# EAGLE board TSB rev2 TSAL rev5 (EAGLE 9.6.2), part 1 of 2
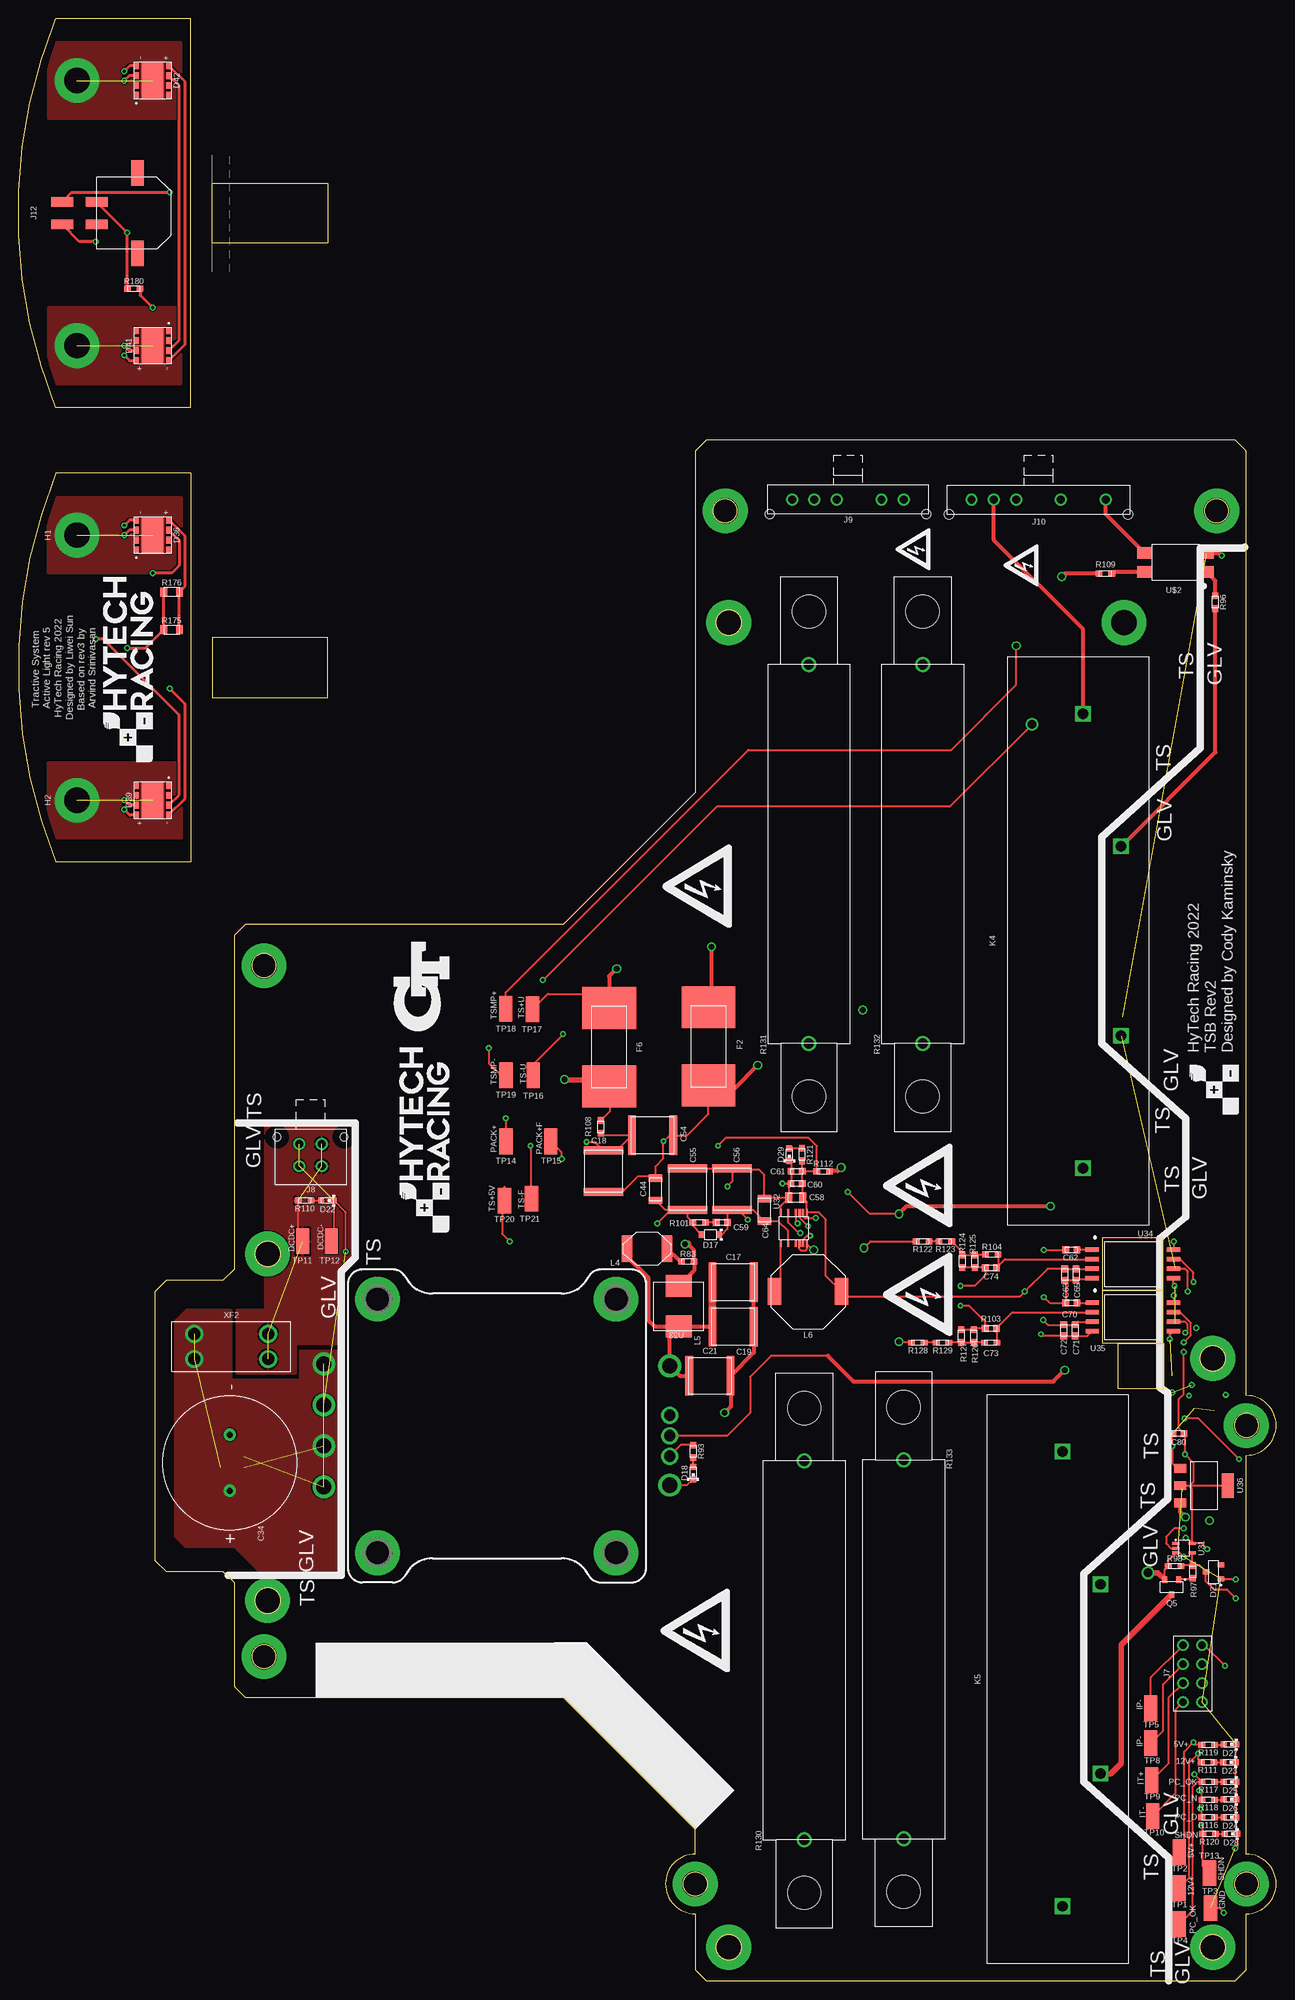
[diagram p0: board, top side]
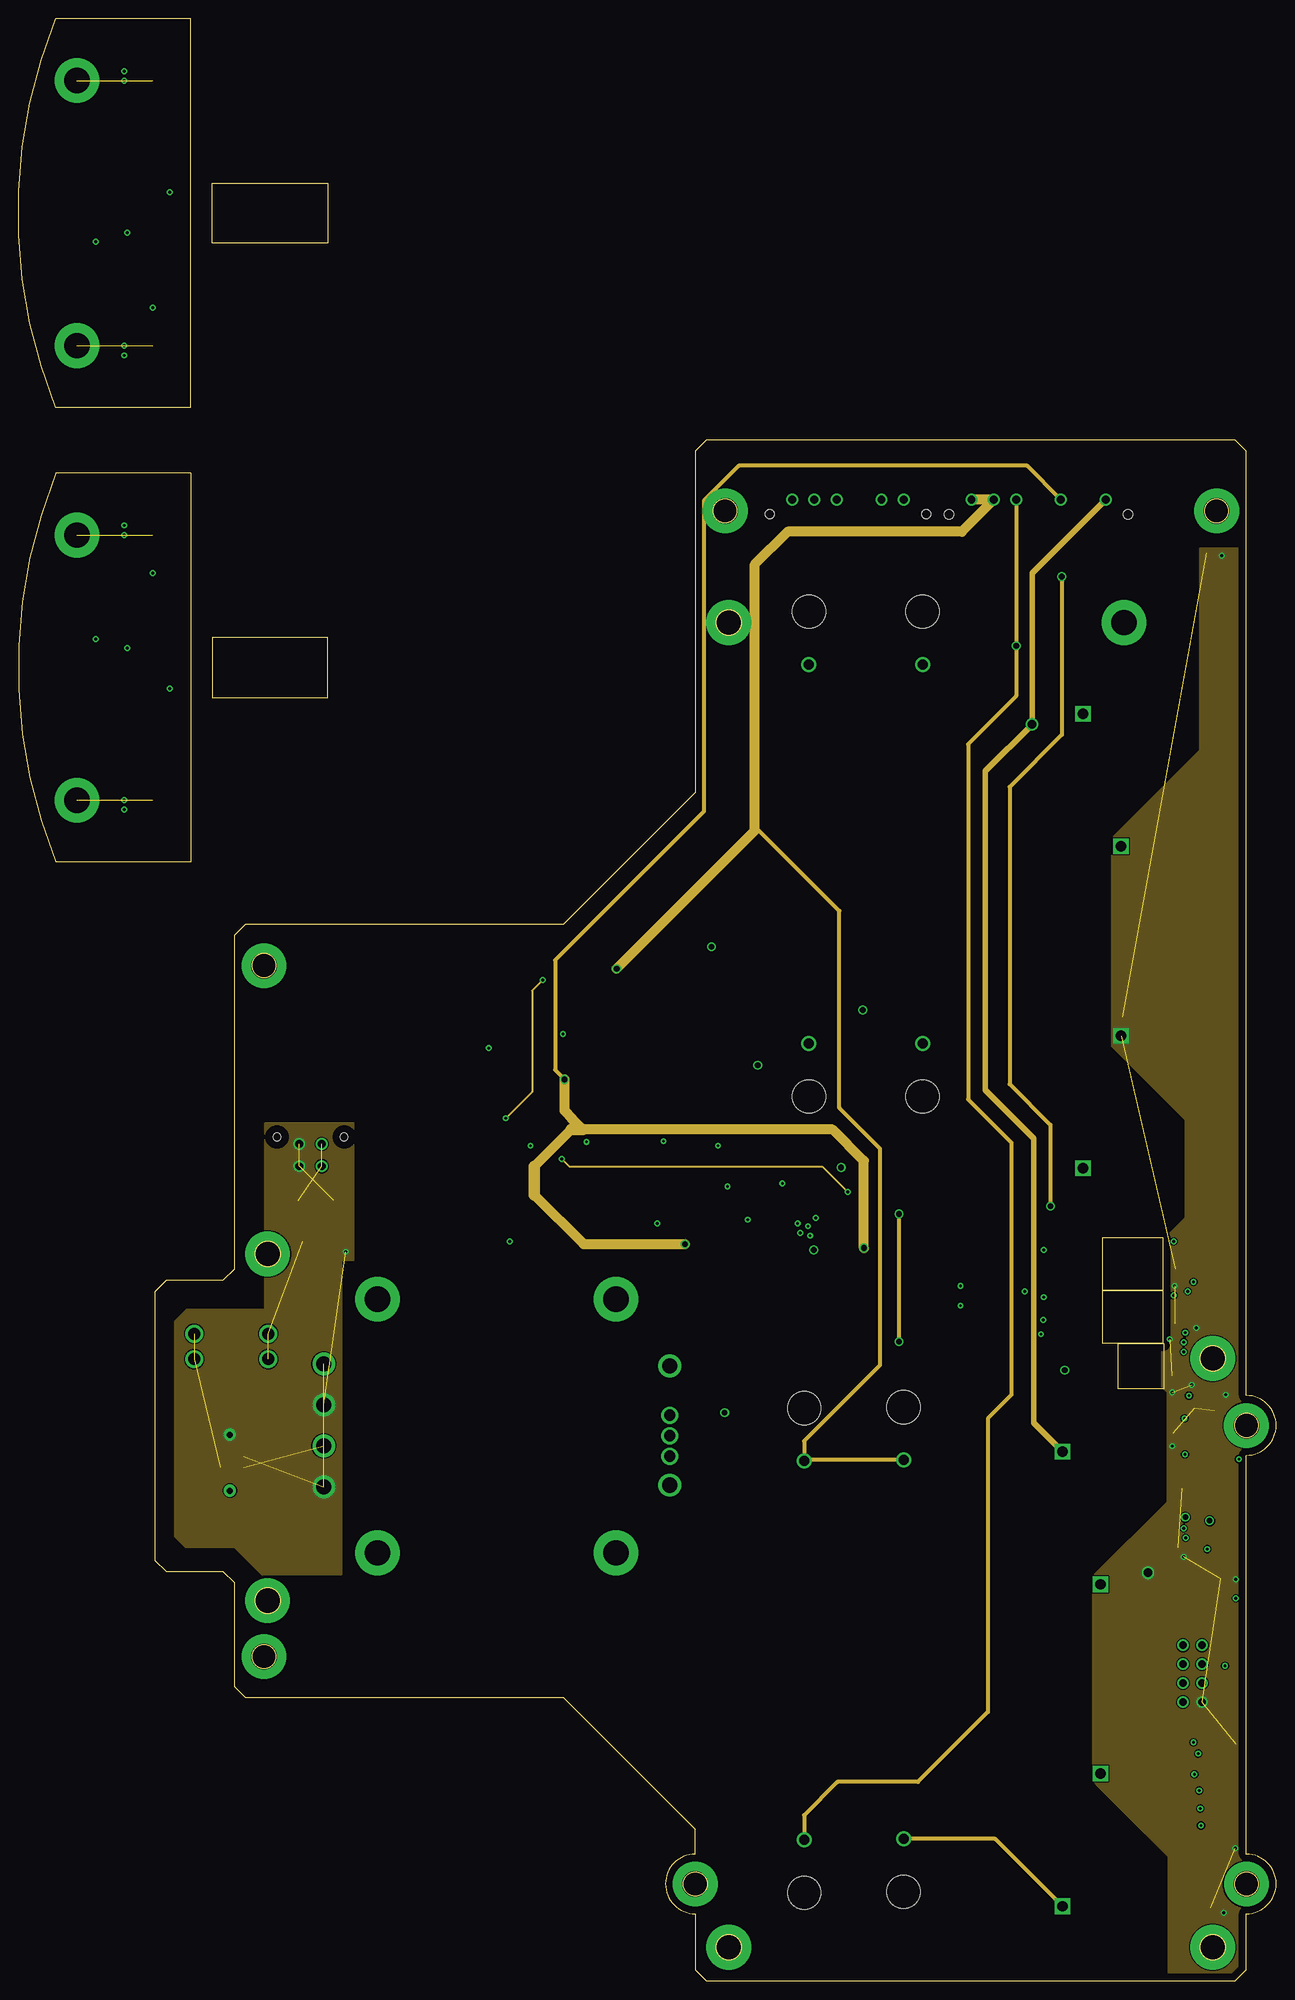
[diagram p1: board, inner layer Route2]
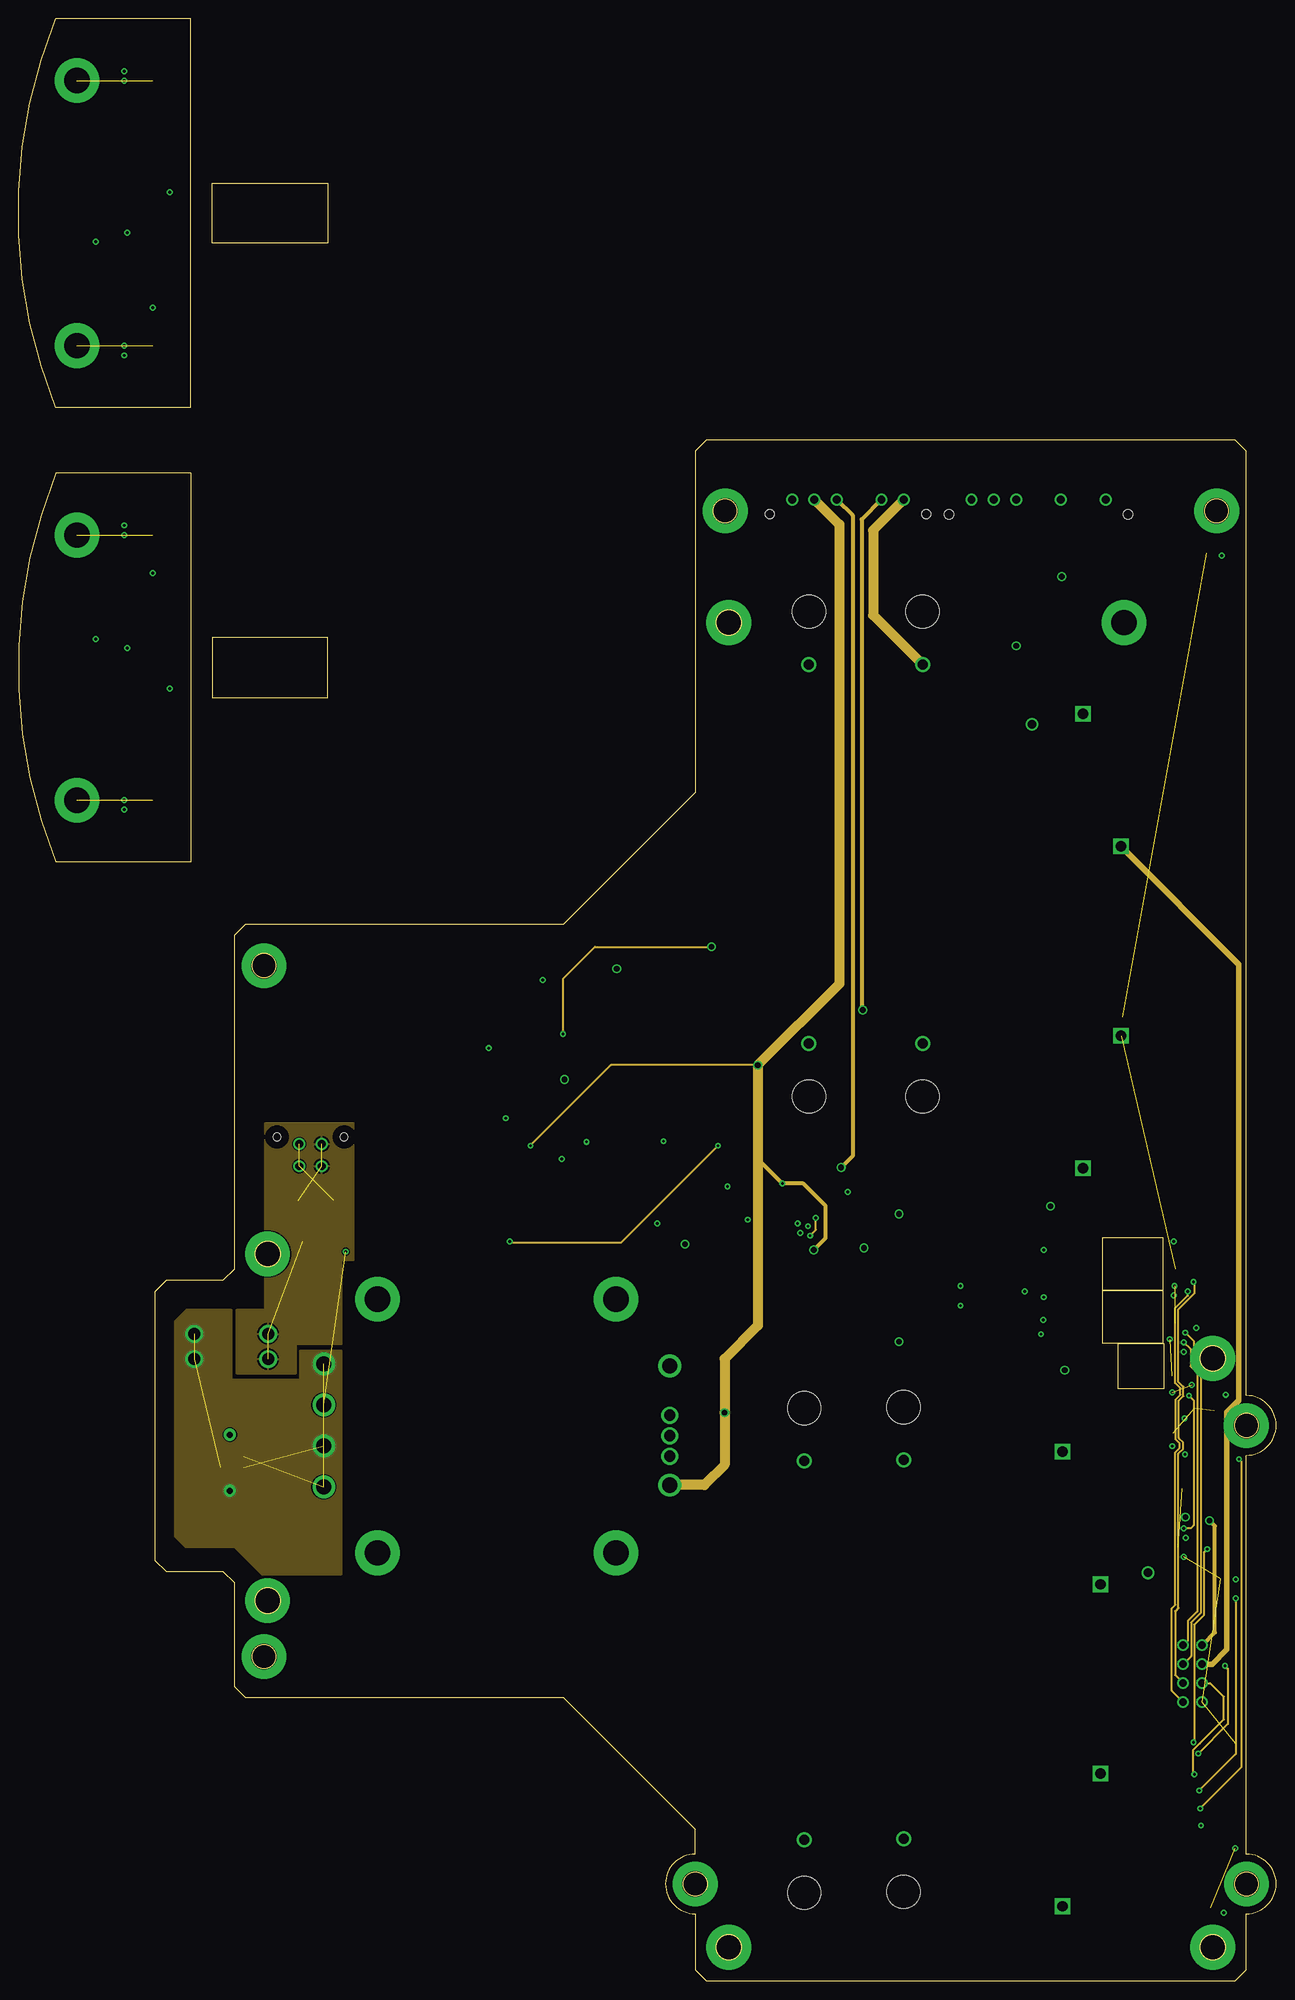
[diagram p2: board, inner layer Route15]
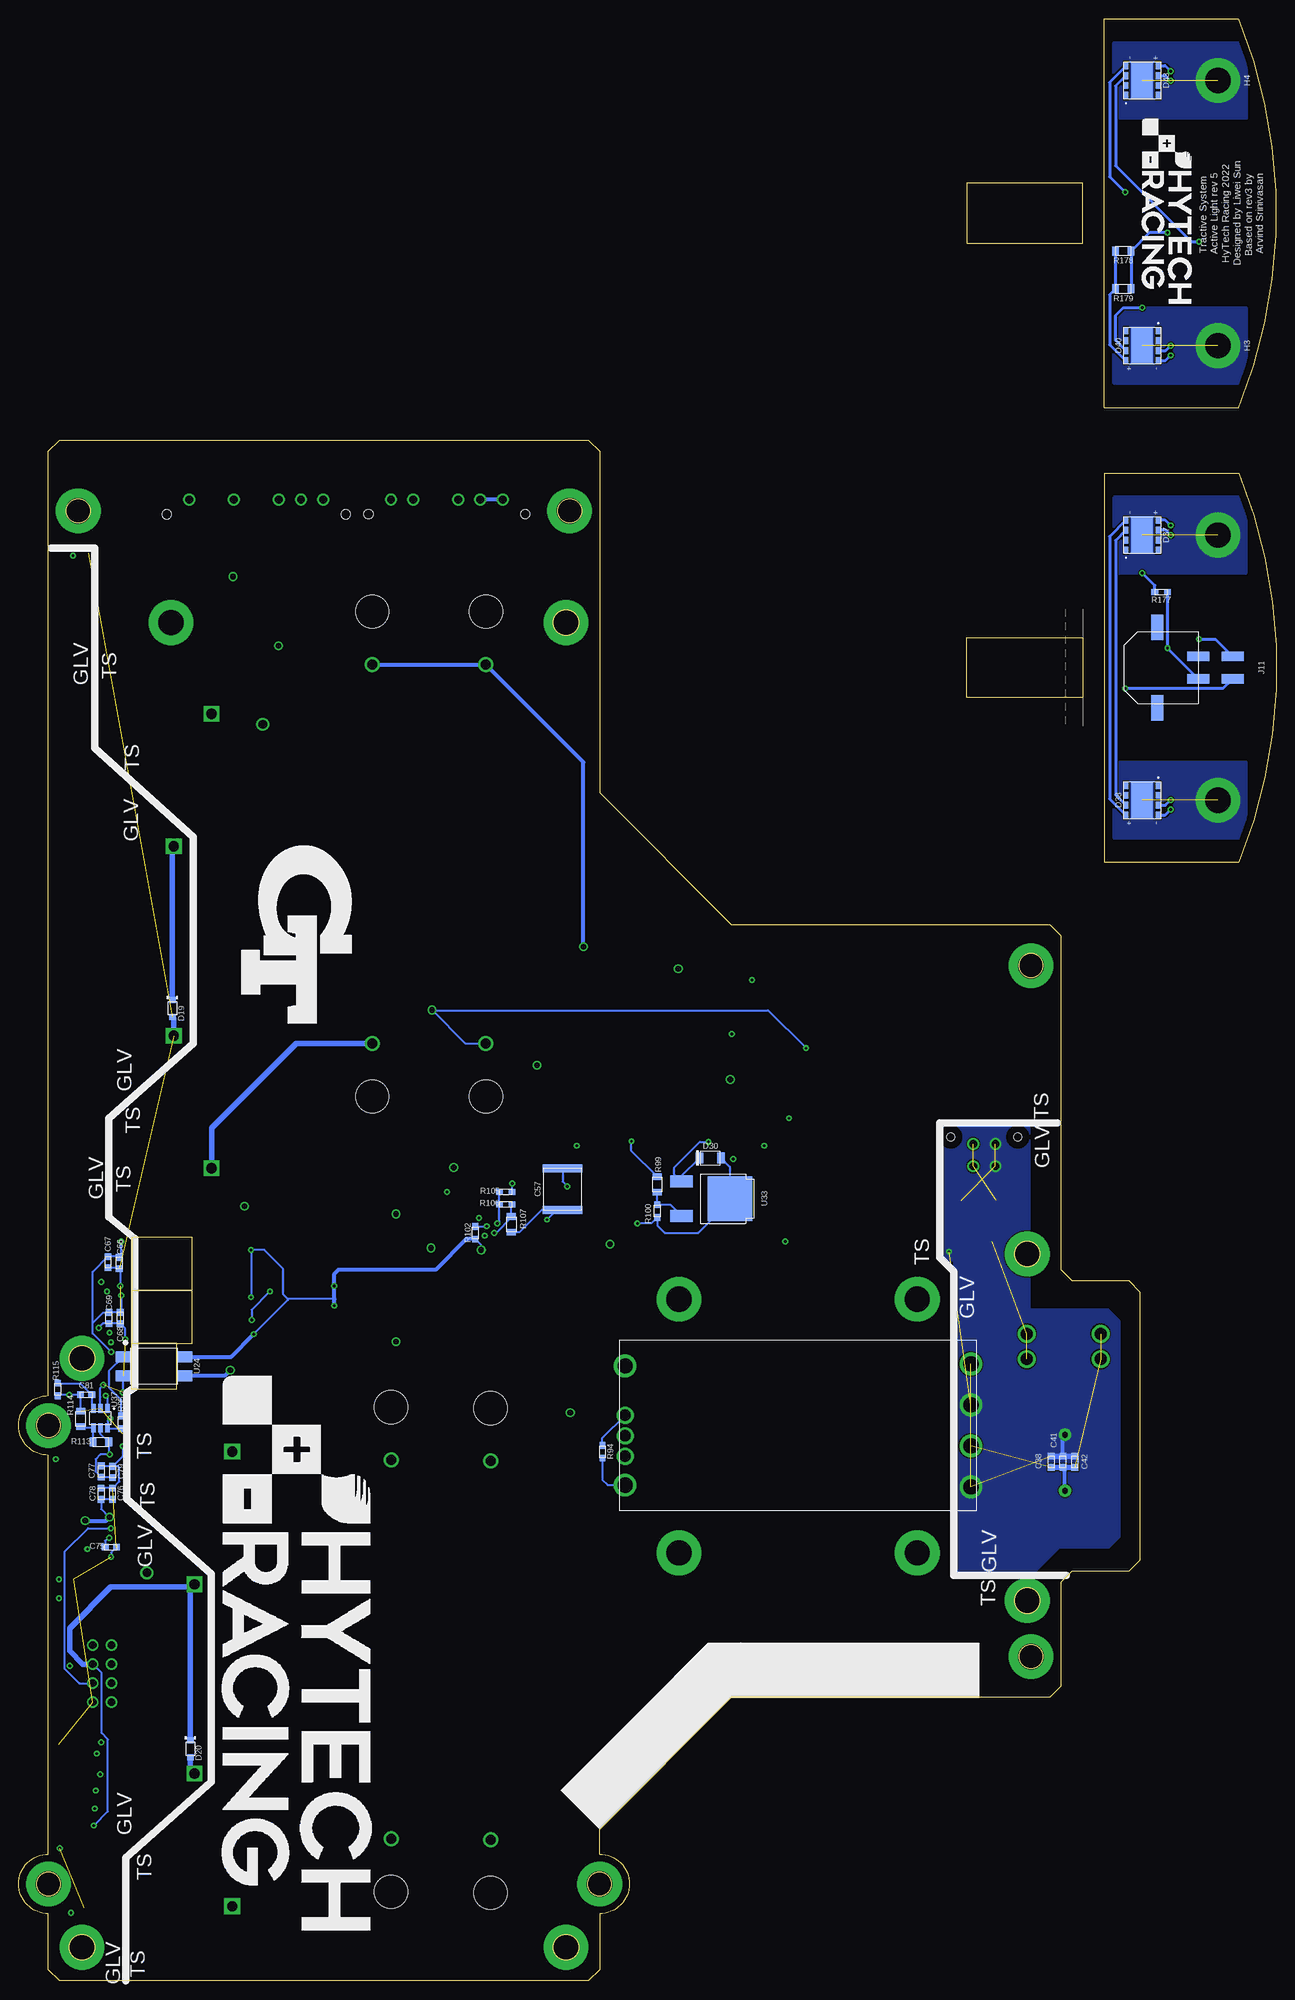
[diagram p3: board, bottom side, seen from below]

Size 168.62 x 263.18 mm. Coordinates in mm from the lower left corner, seen from the top.
Outline: 92.23,0 163.12,0 164.62,1.5 164.62,9 arc180 164.62,17 164.62,70.5 arc180 164.62,78.5 164.62,205.17 163.12,206.67 92.23,206.67 90.73,205.17 90.73,159.35 73.05,141.67 30.39,141.67 28.89,140.17 28.89,95.42 27.39,93.92 19.77,93.92 18.27,92.42 18.27,56.42 19.77,54.92 27.39,54.92 28.89,53.42 28.89,39.5 30.39,38 73.05,38 90.73,20.32 90.73,17 arc180 90.73,9 90.73,1.5 92.23,0
Outline: 23.05,202.22 4.99,202.22 arc44 4.99,150.04 23.05,150.04 23.05,202.22
Outline: 23.05,211 4.99,211 arc-44 4.99,263.18 23.05,263.18 23.05,211
Outline: circle at 95.23,4.5 radius 1.7
Outline: circle at 160.12,4.5 radius 1.7
Outline: circle at 160.12,83.5 radius 1.7
Outline: circle at 95.23,182.17 radius 1.7
Outline: circle at 33.39,51 radius 1.7
Outline: circle at 33.39,97.5 radius 1.7
Outline: circle at 32.89,136.17 radius 1.6
Outline: circle at 94.73,197.17 radius 1.6
Outline: circle at 160.62,197.17 radius 1.6
Outline: circle at 164.62,13 radius 1.6
Outline: circle at 90.73,13 radius 1.6
Outline: circle at 32.89,43.5 radius 1.6
Outline: circle at 164.62,74.5 radius 1.6
Copper layers (1*16): Top 0.035mm / dielectric 1.5mm / Bottom 0.035mm
Design rules "default": minimum track width 6mil, minimum drill 0.35mm, track to track 6mil, track to pad 6mil, pad to pad 6mil, via to via 6mil, smd to smd 6mil, copper to edge 40mil, drill to drill 6mil, minimum pad ring 10mil, minimum via ring 8mil, stop-mask expansion 4mil, vias tented up to drill 0mil, thermal gap 10mil

## Footprints (pad centres in the part's own frame; a part is rotated, then mirrored left to right if it is on the bottom)
2220-CAP = smd 1.05 x 5.3: 1 -2.775,0; 2 2.775,0
EKYC*MM = drill 0.8 pad 1.651: + 3.75,0; - -3.75,0
0603-CAP = smd 0.9 x 0.9: 1 -0.75,0; 2 0.75,0
1206-CAP = smd 1 x 1.8: 1 -1.5,0; 2 1.5,0
0805-CAP = smd 0.95 x 1.4: 1 -0.925,0; 2 0.925,0
SOD-323 = smd 0.8 x 0.9: A -1.15,0; C 1.15,0
0603-LED = smd 0.8 x 0.8: 1 -0.825,0; 2 0.825,0
SOT-23 = smd 0.711 x 0.889: 1 -0.94,-1.003; 2 0.94,-1.003; 3 0,1.003
SOD123F = smd 1 x 1.5: A -1.45,0; C 1.45,0
IN-505FCHWV = smd 0.975 x 0.65: A+ -2.013,2.175; A- -2.013,-2.175; D+ 2.013,2.175; D- 2.013,-2.175 | smd 0.925 x 0.65: B+ -0.662,2.175; B- -0.662,-2.175; C+ 0.662,2.175; C- 0.662,-2.175 | smd 5 x 2.9: THERMAL 0,0
0885 = smd 5.6 x 7.23: 1 -5.25,0; 2 5.25,0
MOUNTING_M3 = drill 3.4 pad 6: P$1 0,0
FLEX_STACK_PTH_08_DUAL = drill 1.016: 1 -3.81,1.27; 2 -1.27,1.27; 3 1.27,1.27; 4 3.81,1.27; 5 -3.81,-1.27; 6 -1.27,-1.27; 7 1.27,-1.27; 8 3.81,-1.27
MOLEX_MICROFIT_PTH_VERTICAL_04_DUAL = drill 1.067: 1 1.499,-2.997; 2 -1.499,-2.997; 3 1.499,0; 4 -1.499,0 | hole 1.067: 4.496,0.94; -4.496,0.94
MOLEX_MICROFIT_PTH_VERTICAL_06_SINGLE_SPACED = drill 1.067: 1 -7.493,0; 2 -4.496,0; 3 -1.499,0; 4 4.496,0; 5 7.493,0 | hole 1.27: 10.503,-1.956; -10.503,-1.956
MOLEX_MICROFIT_PTH_VERTICAL_07_SINGLE_SPACED = drill 1.067: 1 -8.992,0; 2 -5.994,0; 3 -2.997,0; 4 2.997,0; 5 8.992,0 | hole 1.27: 12.002,-1.956; -12.002,-1.956
MOLEX_MICROFIT_SMD_RIGHTANGLE_04_DUAL = smd 1.27 x 2.921: 1 1.5,5.474; 2 -1.5,5.474; 3 1.5,10.097; 4 -1.5,10.097 | smd 3.429 x 1.651: PAD1 5.386,0; PAD2 -5.386,0
335X = drill 1.397 square: 1 30.48,0; 2 12.7,-5.08; 3 -12.7,-5.08; 4 -30.48,0
74451133 = smd 1.4 x 3.5: 1 -2.7,0; 2 2.7,0
WE-LMHI = smd 2.95 x 3.5: 1 -2.725,0; 2 2.725,0
SRU1048 = smd 1.8 x 3.6: 1 -4.5,0; 2 4.5,0
0603-RES = smd 0.9 x 0.8: 1 -0.85,0; 2 0.85,0
0805-RES = smd 0.9 x 1.2: 1 -1.05,0; 2 1.05,0
B20 = drill 1.35: 1 25.4,0; 2 -25.4,0 | hole 4.5: -32.51,0; 32.51,0
MICRO_MINIATURE = smd 3.429 x 1.778: 1 0,0
DCM4623 = drill 2.03 pad 2.79: 1 -23.19,8; 5 -23.19,-8; 6 23.19,8.25; 7 23.19,2.75; 8 23.19,-2.75; 9 23.19,-8.25 | drill 1.52 pad 2.02: 2 -23.19,1.38; 3 -23.19,-1.38; 4 -23.19,-4.13
DIP-4_AIRGAP = smd 1.5 x 1.9: 1 -1.27,-4.15; 2 1.27,-4.15; 3 -1.27,4.15; 4 1.27,4.15
SC-70-5 = smd 0.4 x 0.9: 1 -0.65,-1.1; 2 0,-1.1; 3 0.65,-1.1; 4 0.65,1.1; 5 -0.65,1.1
MSE16(12) = smd 0.309 x 0.902: 1 -1.75,-2.102; 3 -0.75,-2.102; 5 0.25,-2.102; 6 0.75,-2.102; 7 1.25,-2.102; 8 1.75,-2.102; 9 1.75,2.102; 10 1.25,2.102; 11 0.75,2.102; 12 0.25,2.102; 14 -0.75,2.102; 16 -1.75,2.102
DPAK(2-7K1S) = smd 1.6 x 3: 1 -2.3,-3.5; 3 2.3,-3.5 | smd 6 x 6: 2 0,3
SOIC-08(WIDE,0.295")-AIRGAP = smd 0.6 x 1.8: 1 -1.905,-5.45; 2 -0.635,-5.45; 3 0.635,-5.45; 4 1.905,-5.45; 5 1.905,5.45; 6 0.635,5.45; 7 -0.635,5.45; 8 -1.905,5.45
SOT223 = smd 1.2 x 1.6: 1 -2.3,-3.2; 2 0,-3.2; 3 2.3,-3.2 | smd 3.3 x 1.6: 4 0,3.2
SOT-23-6 = smd 0.62 x 1.22: 1 -0.95,-1.31; 2 0,-1.31; 3 0.95,-1.31; 4 -0.95,1.31; 5 0,1.31; 6 0.95,1.31
DIP-4 = smd 1.5 x 1.9: 1 -1.27,-4.15; 2 1.27,-4.15; 3 -1.27,4.15; 4 1.27,4.15
3568 = drill 1.6: 1 -4.953,1.702; 2 -4.953,-1.702; 3 4.953,-1.702; 4 4.953,1.702

## Placement (x,y rotation side)
C17  CAPACITOR_2220_630V_0.1UF  [2220-CAP]  95.81,93.73 0 top
C18  CAPACITOR_2220_630V_0.1UF  [2220-CAP]  78.41,108.58 270 top
C19  CAPACITOR_2220_630V_1UF  [2220-CAP]  95.81,87.76 0 top
C21  CAPACITOR_2220_630V_1UF  [2220-CAP]  92.69,81.15 0 top
C34  CAPACITOR_POLAR__3600UF  [EKYC*MM]  28.32,69.49 270 top
C38  CAPACITOR_0603_25V_10UF  [0603-CAP]  30.15,69.62 270 bottom
C41  CAPACITOR_0603_25V_1UF  [0603-CAP]  28.6,69.62 270 bottom
C42  CAPACITOR_0603_35V_0.1UF  [0603-CAP]  27.01,69.62 270 bottom
C44  CAPACITOR_1206_250V_0.1UF  [1206-CAP]  85.4,106.17 90 top
C54  CAPACITOR_2220_630V_1UF  [2220-CAP]  85.01,113.41 0 top
C55  CAPACITOR_2220_250V_1UF  [2220-CAP]  89.71,106.17 90 top
C56  CAPACITOR_2220_250V_1UF  [2220-CAP]  95.68,106.17 90 top
C57  CAPACITOR_2220_250V_1UF  [2220-CAP]  95.68,106.17 90 bottom
C58  CAPACITOR_0805_25V_22UF  [0805-CAP]  104.19,105.03 180 top
C59  CAPACITOR_0603_10V_10NF  [0603-CAP]  94.29,101.73 180 top
C60  CAPACITOR_0603_25V_1UF  [0603-CAP]  104.32,106.93 180 top
C61  CAPACITOR_0603_25V_0.1UF  [0603-CAP]  104.32,108.58 180 top
C62  CAPACITOR_0603_10V_1UF  [0603-CAP]  141.15,98.04 180 top
C63  CAPACITOR_0603_10V_1UF  [0603-CAP]  141.78,94.74 270 top
C64  CAPACITOR_1206_250V_0.1UF  [1206-CAP]  100,103.38 90 top
C65  CAPACITOR_0603_10V_1UF  [0603-CAP]  140.26,94.74 270 top
C66  CAPACITOR_0603_10V_1UF  [0603-CAP]  155.12,96.27 270 bottom
C67  CAPACITOR_0603_10V_0.1UF  [0603-CAP]  156.64,96.39 270 bottom
C68  CAPACITOR_0603_10V_0.1UF  [0603-CAP]  154.99,88.9 270 bottom
C69  CAPACITOR_0603_10V_1UF  [0603-CAP]  156.52,88.9 270 bottom
C70  CAPACITOR_0603_10V_1UF  [0603-CAP]  141.15,90.93 180 top
C71  CAPACITOR_0603_10V_1UF  [0603-CAP]  141.66,87.25 270 top
C72  CAPACITOR_0603_10V_1UF  [0603-CAP]  140.13,87.25 270 top
C73  CAPACITOR_0603_10V_10NF  [0603-CAP]  130.35,87.5 180 top
C74  CAPACITOR_0603_10V_10NF  [0603-CAP]  130.35,95.63 180 top
C75  CAPACITOR_0603_10V_0.1UF  [0603-CAP]  156.26,58.17 0 bottom
C76  CAPACITOR_0603_25V_1UF  [0603-CAP]  156.03,65.32 90 bottom
C77  CAPACITOR_0603_10V_4.7UF  [0603-CAP]  157.53,68.33 90 bottom
C78  CAPACITOR_0603_25V_0.1UF  [0603-CAP]  157.56,65.34 90 bottom
C79  CAPACITOR_0603_10V_0.1UF  [0603-CAP]  156.02,68.26 90 bottom
C80  CAPACITOR_0603_10V_0.1UF  [0603-CAP]  155.5,73.41 180 top
C81  CAPACITOR_0603_10V_0.1UF  [0603-CAP]  159.56,78.61 180 bottom
D17  SCHOTTKY_SOD323_30V  [SOD-323]  92.76,100.08 0 top
D18  LED_0603_RED  [0603-LED]  90.44,68.1 90 top
D19  SCHOTTKY_SOD323_30V  [SOD-323]  148.01,130.43 90 bottom
D20  SCHOTTKY_SOD323_30V  [SOD-323]  145.59,31.11 90 bottom
D21  TVS_8V  [SOT-23]  160.2,54.86 90 top
D22  LED_0603_BLUE  [0603-LED]  41.4,104.65 180 top
D23  LED_0603_BLUE  [0603-LED]  162.36,29.34 180 top
D24  LED_0603_WHITE  [0603-LED]  162.43,21.96 180 top
D25  LED_0603_GREEN  [0603-LED]  162.43,26.7 180 top
D26  LED_0603_YELLOW  [0603-LED]  162.43,24.33 180 top
D27  LED_0603_BLUE  [0603-LED]  162.43,31.71 180 top
D28  LED_0603_ORANGE  [0603-LED]  162.55,19.71 180 top
D29  LED_0603_BLUE  [0603-LED]  103.36,110.8 90 top
D30  RECTIFIER_400V_SOD123  [SOD123F]  75.87,110.36 180 bottom
D36  LED_RGBW_IN-505FCHWV  [IN-505FCHWV]  17.97,193.91 270 top
D37  LED_RGBW_IN-505FCHWV  [IN-505FCHWV]  17.97,193.91 270 bottom
D38  LED_RGBW_IN-505FCHWV  [IN-505FCHWV]  17.97,158.35 90 bottom
D39  LED_RGBW_IN-505FCHWV  [IN-505FCHWV]  17.97,158.35 90 top
D40  LED_RGBW_IN-505FCHWV  [IN-505FCHWV]  17.97,219.31 90 bottom
D41  LED_RGBW_IN-505FCHWV  [IN-505FCHWV]  17.97,219.31 90 top
D42  LED_RGBW_IN-505FCHWV  [IN-505FCHWV]  17.97,254.87 270 top
D43  LED_RGBW_IN-505FCHWV  [IN-505FCHWV]  17.97,254.87 270 bottom
F2  FUSE_0885_1.25  [0885]  92.5,125.33 270 top
F6  FUSE_0885_1.25  [0885]  79.17,125.22 270 top
H1  MOUNTING_HEATSINK_M3  [MOUNTING_M3]  7.81,193.91 90 top
H2  MOUNTING_HEATSINK_M3  [MOUNTING_M3]  7.81,158.35 90 top
H3  MOUNTING_HEATSINK_M3  [MOUNTING_M3]  7.81,219.31 270 bottom
H4  MOUNTING_HEATSINK_M3  [MOUNTING_M3]  7.81,254.87 270 bottom
J7  CONNECTOR-8_S_S  [FLEX_STACK_PTH_08_DUAL]  157.42,41.2 270 top
J8  CONNECTOR-4__  [MOLEX_MICROFIT_PTH_VERTICAL_04_DUAL]  39.14,112.26 0 top
J9  CONNECTOR-5_MICRO_V6S_  [MOLEX_MICROFIT_PTH_VERTICAL_06_SINGLE_SPACED]  111.2,198.67 0 top
J10  CONNECTOR-5_MICRO_V7S_  [MOLEX_MICROFIT_PTH_VERTICAL_07_SINGLE_SPACED]  136.76,198.66 0 top
J11  CONNECTOR-4_μF_S_RA_  [MOLEX_MICROFIT_SMD_RIGHTANGLE_04_DUAL]  15.94,176.13 270 bottom
J12  CONNECTOR-4_μF_S_RA_  [MOLEX_MICROFIT_SMD_RIGHTANGLE_04_DUAL]  15.94,237.09 90 top
K4  RELAY_SPST_NC_POLARIZED_3550_12  [335X]  142.74,139.45 90 top
K5  RELAY_SPST_NO_3550_12  [335X]  139.98,40.48 90 top
L4  INDUCTOR_74451133_3.6UH  [74451133]  84.26,98.2 0 top
L5  INDUCTOR_WELMHI_56UH  [WE-LMHI]  88.49,90.47 90 top
L6  INDUCTOR_SRU1048_330UH  [SRU1048]  105.84,92.46 0 top
Q5  TRANSISTOR_N_MOS__PMV15ENEA  [SOT-23]  154.61,52.83 180 top
R83  RESISTOR_0603_1.62  [0603-RES]  89.72,96.46 0 top
R93  RESISTOR_0603_1K  [0603-RES]  90.45,71.01 270 top
R94  RESISTOR_0603_DNP  [0603-RES]  90.34,70.97 270 bottom
R95  RESISTOR_0603_1K  [0603-RES]  154.86,74.93 90 bottom
R96  RESISTOR_0603_1K  [0603-RES]  160.45,184.91 270 top
R97  RESISTOR_0603_10  [0603-RES]  157.4,54.86 270 top
R98  RESISTOR_0603_10K  [0603-RES]  154.99,55.63 0 top
R99  RESISTOR_0805_HV365K  [0805-RES]  82.98,106.81 270 bottom
R100  RESISTOR_0603_3.32K  [0603-RES]  82.98,103.25 270 bottom
R101  RESISTOR_0603_10K  [0603-RES]  91.24,101.73 0 top
R102  RESISTOR_0603_75K  [0603-RES]  107.37,100.33 90 bottom
R103  RESISTOR_0603_33.2K  [0603-RES]  130.35,85.6 0 top
R104  RESISTOR_0603_33.2K  [0603-RES]  130.48,97.41 0 top
R105  RESISTOR_0603_8.66K  [0603-RES]  103.3,105.79 180 bottom
R106  RESISTOR_0603_13K  [0603-RES]  103.3,104.14 0 bottom
R107  RESISTOR_0805_976K  [0805-RES]  102.54,101.47 270 bottom
R108  RESISTOR_0603_3.3  [0603-RES]  78.03,114.55 270 top
R109  RESISTOR_0603_3.3  [0603-RES]  145.72,188.72 0 top
R110  RESISTOR_0603_1K  [0603-RES]  38.35,104.65 180 top
R111  RESISTOR_0603_1K  [0603-RES]  159.44,29.34 180 top
R112  RESISTOR_0603_1K  [0603-RES]  107.87,108.58 0 top
R113  RESISTOR_0805_1M  [0805-RES]  157.6,72.26 0 bottom
R114  RESISTOR_0805_523K  [0805-RES]  160.31,75.38 270 bottom
R115  RESISTOR_0603_154K  [0603-RES]  163.36,79.31 90 bottom
R116  RESISTOR_0603_1K  [0603-RES]  159.5,21.94 180 top
R117  RESISTOR_0603_1K  [0603-RES]  159.51,26.68 180 top
R118  RESISTOR_0603_1K  [0603-RES]  159.51,24.31 180 top
R119  RESISTOR_0603_1K  [0603-RES]  159.49,31.64 0 top
R120  RESISTOR_0603_1K  [0603-RES]  159.64,19.7 180 top
R121  RESISTOR_0603_1K  [0603-RES]  105.04,110.81 270 top
R122  RESISTOR_0603_360K  [0603-RES]  121.21,99.19 180 top
R123  RESISTOR_0603_510K  [0603-RES]  124.26,99.19 180 top
R124  RESISTOR_0603_33K  [0603-RES]  126.54,96.52 90 top
R125  RESISTOR_0603_33K  [0603-RES]  128.19,96.52 90 top
R126  RESISTOR_0603_33K  [0603-RES]  128.07,86.49 270 top
R127  RESISTOR_0603_33K  [0603-RES]  126.42,86.49 270 top
R128  RESISTOR_0603_360K  [0603-RES]  120.57,85.6 180 top
R129  RESISTOR_0603_510K  [0603-RES]  123.88,85.6 180 top
R130  RESISTOR_B20_10K  [B20]  105.33,44.32 90 top
R131  RESISTOR_B20_10K  [B20]  105.97,151.13 90 top
R132  RESISTOR_B20_10K  [B20]  121.21,151.13 90 top
R133  RESISTOR_B20_750  [B20]  118.67,44.45 270 top
R175  RESISTOR_0805_56  [0805-RES]  20.51,181.21 0 top
R176  RESISTOR_0805_56  [0805-RES]  20.51,186.29 0 top
R177  RESISTOR_0603_5.1  [0603-RES]  15.43,186.29 180 bottom
R178  RESISTOR_0805_56  [0805-RES]  20.51,232.01 180 bottom
R179  RESISTOR_0805_56  [0805-RES]  20.51,226.93 180 bottom
R180  RESISTOR_0603_5.1  [0603-RES]  15.43,226.93 0 top
TP1  TEST_POINT  [MICRO_MINIATURE]  155.63,12.45 90 top
TP2  TEST_POINT  [MICRO_MINIATURE]  155.63,17.27 90 top
TP3  TEST_POINT  [MICRO_MINIATURE]  159.82,9.78 90 top
TP4  TEST_POINT  [MICRO_MINIATURE]  155.63,7.62 90 top
TP5  TEST_POINT  [MICRO_MINIATURE]  151.82,36.58 90 top
TP8  TEST_POINT  [MICRO_MINIATURE]  151.82,31.88 90 top
TP9  TEST_POINT  [MICRO_MINIATURE]  151.94,26.92 90 top
TP10  TEST_POINT  [MICRO_MINIATURE]  152.07,22.1 90 top
TP11  TEST_POINT  [MICRO_MINIATURE]  38.1,99.19 90 top
TP12  TEST_POINT  [MICRO_MINIATURE]  41.91,99.19 90 top
TP13  TEST_POINT  [MICRO_MINIATURE]  159.69,14.48 90 top
TP14  TEST_POINT  [MICRO_MINIATURE]  65.36,112.58 90 top
TP15  TEST_POINT  [MICRO_MINIATURE]  71.35,112.58 90 top
TP16  TEST_POINT  [MICRO_MINIATURE]  68.99,121.47 90 top
TP17  TEST_POINT  [MICRO_MINIATURE]  68.9,130.3 90 top
TP18  TEST_POINT  [MICRO_MINIATURE]  65.31,130.36 90 top
TP19  TEST_POINT  [MICRO_MINIATURE]  65.34,121.47 90 top
TP20  TEST_POINT  [MICRO_MINIATURE]  65.16,104.65 90 top
TP21  TEST_POINT  [MICRO_MINIATURE]  68.76,104.9 90 top
U23  DCM4623TD2J13D0T70  [DCM4623]  64.12,74.49 0 bottom
U24  RELAY_SOLIDSTATE_NC_AG  [DIP-4_AIRGAP]  150.47,82.43 270 bottom
U31  LOGICGATE_INVERTER_DCKR  [SC-70-5]  156.26,58.04 270 top
U32  LTC3639  [MSE16(12)]  103.94,100.96 0 top
U33  VOLTAGE_REGULATOR_ADJ_LR8_DPAK  [DPAK(2-7K1S)]  76.25,104.9 270 bottom
U34  ISO224B_AIRGAP  [SOIC-08(WIDE,0.295")-AIRGAP]  149.4,96.14 270 top
U35  ISO224B_AIRGAP  [SOIC-08(WIDE,0.295")-AIRGAP]  149.4,89.03 270 top
U36  VOLTAGE_REGULATOR_SOT223_5V  [SOT223]  158.93,66.42 270 top
U37  LTC6994_1  [SOT-23-6]  157.65,75.45 180 bottom
U$2  RELAY_SOLIDSTATE_NO  [DIP-4]  155.12,190.25 90 top
U$23  [MOUNTING_M3]  164.63,12.98 90 top
U$24  [MOUNTING_M3]  90.71,12.99 90 top
U$25  [MOUNTING_M3]  164.62,74.48 90 top
U$26  [MOUNTING_M3]  160.64,197.16 90 top
U$27  [MOUNTING_M3]  94.75,197.17 90 top
U$28  [MOUNTING_M3]  32.89,43.49 90 top
U$29  [MOUNTING_M3]  32.89,136.15 90 top
U$30  [MOUNTING_M3]  48.13,57.4 90 top
U$31  [MOUNTING_M3]  48.13,91.42 90 top
U$32  [MOUNTING_M3]  80.09,57.4 90 top
U$33  [MOUNTING_M3]  80.09,91.42 90 top
U$34  [MOUNTING_M3]  148.21,182.17 90 top
U$35  [MOUNTING_M3]  160.12,4.5 90 top
U$36  [MOUNTING_M3]  160.12,83.49 90 top
U$37  [MOUNTING_M3]  95.23,4.5 90 top
U$38  [MOUNTING_M3]  95.23,182.17 90 top
U$39  [MOUNTING_M3]  33.38,97.5 90 top
U$41  [MOUNTING_M3]  33.38,51 90 top
U$43  [LOGO_HYTECH_MEDIUM]  57.71,100.33 90 top
U$44  [HV_0.50"]  119.94,192.02 90 top
U$45  [HV_0.50"]  134.42,189.86 90 top
U$46  [HV_LARGE]  90.73,46.99 90 top
U$47  [HV_LARGE]  120.57,106.68 90 top
U$48  [HV_1.00"]  120.57,92.07 90 top
U$52  [HV_1.00"]  90.98,146.81 90 top
U$53  [TS]  38.66,52.07 90 top
U$54  [LOGO_GT_0.50"]  54.03,133.35 90 top
U$55  [LOGO_HYTECH_SQUARE_0.28"]  160.33,119.51 90 top
U$56  [GLV]  158.29,107.7 90 top
U$57  [GLV]  154.48,122.17 90 top
U$58  [GLV]  153.59,155.7 90 top
U$59  [GLV]  160.33,176.66 90 top
U$60  [GLV]  151.71,58.34 90 top
U$61  [GLV]  154.48,22.43 90 top
U$62  [GLV]  156.01,2.41 90 top
U$63  [TS]  152.71,2.29 90 top
U$64  [TS]  151.82,15.29 90 top
U$65  [TS]  151.38,65.1 90 top
U$66  [TS]  154.61,107.57 90 top
U$67  [TS]  151.82,71.75 90 top
U$68  [TS]  153.34,115.44 90 top
U$69  [TS]  153.47,164.08 90 top
U$70  [TS]  47.55,97.79 90 top
U$71  [TS]  31.55,117.35 90 top
U$72  [GLV]  38.53,57.66 90 top
U$73  [GLV]  41.5,91.69 90 top
U$74  [GLV]  31.42,111.89 90 top
U$75  [TS]  156.52,176.4 90 top
U$76  [LOGO_GT_LARGE]  131.37,140.33 270 bottom
U$77  [LOGO_HYTECH_EXTRA_LARGE]  141.53,81.28 270 bottom
U$81  [LOGO_HYTECH_MEDIUM]  17.97,163.43 90 top
U$82  [LOGO_HYTECH_MEDIUM]  17.97,249.79 270 bottom
XF2  FUSE_HOLDER_MINIBLADEPTH  [3568]  28.5,85.09 0 top

## Library data of the parts
C17 C18 = HyTechDevices; CAPACITANCE: 0.1uF; DKPN: 445-11980-2-ND; MANUFACTURER: TDK Coporation; MOPN: 810-C5750CH2J104K2KC; MPN: C5750CH2J104K280KC; TOLERANCE: 10%; VOLTAGE: 630V
C19 C21 C54 = HyTechDevices; CAPACITANCE: 1µF; DKPN: 1608-2220Y6300105KXTWS2CT-ND; MANUFACTURER: Knowles Syfer; MOPN: 843-2220Y63105KXTWS2; MPN: 2220Y6300105KXTWS2; TOLERANCE: 10%; VOLTAGE: 630V
C34 = HyTechDevices; CAPACITANCE: 3600uF; DKPN: 565-EKYC250ELL362ML20S-ND; MANUFACTURER: United Chemi-con; MOPN: 661-YC250ELL362ML20S; MPN: EKYC250ELL362ML20S; VOLTAGE: 25V
C38 = HyTechDevices; CAPACITANCE: 10µF; DKPN: 490-7202-1-ND; MANUFACTURER: Murata Electronics; MOPN: 81-GRM188R61E106MA3D; MPN: GRM188R61E106MA73D; TOLERANCE: 20%; VOLTAGE: 25V
C41 C60 C76 = HyTechDevices; CAPACITANCE: 1µF; DKPN: 1276-1184-1-ND; MANUFACTURER: Samsung Electro-Mechanics; MOPN: 187-CL10B105KA8NNNC; MPN: CL10B105KA8NNNC; TOLERANCE: 10%; VOLTAGE: 25V
C42 = HyTechDevices; CAPACITANCE: 0.1µF; DKPN: 587-3354-1-ND; MANUFACTURER: Taiyo Yuden; MOPN: 963-GMK107B7104KAHT; MPN: GMK107B7104KAHT; TOLERANCE: 10%; VOLTAGE: 35V
C44 C64 = HyTechDevices; CAPACITANCE: 0.1uF; DKPN: 445-6079-2-ND; MANUFACTURER: TDK Corporation; MOPN: 810-C3216X7R2E104KT5; MPN: C3216X7R2E104K160AM; TOLERANCE: 10%; VOLTAGE: 250V
C55-C57 = HyTechDevices; CAPACITANCE: 1µF; DKPN: 445-2304-2-ND; MANUFACTURER: TDK Corporation; MOPN: 810-C5750X7R2E105K; MPN: C5750X7R2E105K230KA; TOLERANCE: 10%; VOLTAGE: 250V
C58 = HyTechDevices; CAPACITANCE: 22µF; DKPN: 311-1903-1-ND; MANUFACTURER: Yageo; MOPN: 603-CC805MKX5R8BB226; MPN: CC0805MKX5R8BB226; TOLERANCE: 20%; VOLTAGE: 25V
C59 C73 C74 = HyTechDevices; CAPACITANCE: 10nF; DKPN: 311-4054-1-ND; MANUFACTURER: Yageo; MOPN: 603-CC603KRX7R6BB103; MPN: CC0603KRX7R6BB103; TOLERANCE: 10%; VOLTAGE: 10V
C61 C78 = HyTechDevices; CAPACITANCE: 0.1µF; DKPN: 1276-1006-1-ND; MANUFACTURER: Samsung Electro-Mechanics; MOPN: 187-CL10B104KA8NNNC; MPN: CL10B104KA8NNNC; TOLERANCE: 10%; VOLTAGE: 25V
C62 C63 C65 C66 C69-C72 = HyTechDevices; CAPACITANCE: 1µF; DKPN: 311-1796-1-ND; MANUFACTURER: Yageo; MOPN: 603-CC603KRX7R6BB105; MPN: CC0603KRX7R6BB105; TOLERANCE: 10%; VOLTAGE: 10V
C67 C68 C75 C79-C81 = HyTechDevices; CAPACITANCE: 0.1µF; DKPN: 720-1688-1-ND; MANUFACTURER: Vishay Vitramon; MOPN: 77-VJ0603Y104JXQPBC; MPN: VJ0603Y104JXQPW1BC; TOLERANCE: 5%; VOLTAGE: 10V
C77 = HyTechDevices; CAPACITANCE: 4.7µF; DKPN: 1276-1044-1-ND; MANUFACTURER: Samsung Electro-Mechanics; MOPN: 187-CL10A475KP8NNNC; MPN: CL10A475KP8NNNC; TOLERANCE: 10%; VOLTAGE: 10V
D17 D19 D20 = HyTechDevices; CURRENT: 0.8A; DKPN: CUS08F30H3FTR-ND; MANUFACTURER: Toshiba Semiconductor and Storage; MOPN: 757-CUS08F30H3F; MPN: CUS08F30; VOLTAGE: 30V
D18 = HyTechDevices; COLOR: Red; DKPN: 754-1786-1-ND; MANUFACTURER: Kingbright; MOPN: 604-APT1608SECKJ3PRV; MPN: APT1608SECK/J3-PRV
D21 = HyTechDevices; DKPN: GSOT08-E3-08TR-ND; MANUFACTURER: Vishay General Semiconductor - Diodes Division; MOPN: 78-GSOT08-E3-08; MPN: GSOT08-E3-08; VOLTAGE: 8V
D22 D23 D27 D29 = HyTechDevices; COLOR: Blue; DKPN: 754-1789-1-ND; MANUFACTURER: Kingbright; MOPN: 604-APT1608VBC/D; MPN: APT1608VBC/D
D24 = HyTechDevices; COLOR: White; DKPN: SM0603UWC-ND; MANUFACTURER: Bivar Inc.; MOPN: 749-SM0603UWC; MPN: SM0603UWC
D25 = HyTechDevices; COLOR: Green; DKPN: 754-1790-1-ND; MANUFACTURER: Kingbright; MOPN: 604-APT1608ZGCK; MPN: APT1608ZGCK
D26 = HyTechDevices; COLOR: Yellow; DKPN: 754-1788-1-ND; MANUFACTURER: Kingbright; MOPN: 604-APT1608SYCK/J3-PRV; MPN: APT1608SYCK/J3-PRV
D28 = HyTechDevices; COLOR: Orange; DKPN: 754-1120-1-ND; MANUFACTURER: Kingbright; MOPN: 604-APT1608SECK; MPN: APT1608SECK
D30 = HyTechDevicesTempTSB; CURRENT: 1A; DKPN: US1GWF-7DITR-ND; MANUFACTURER: Diodes Incorporated; MOPN: 621-US1GWF-7; MPN: US1GWF-7; VOLTAGE: 400V
D36-D43 = HyTechDevices; COLOR: RGBW; DKPN: 1830-1097-2-ND; MANUFACTURER: INOLUX; MOPN: 743-IN-505FCHWV; MPN: IN-505FCHWV
F2 F6 = HyTechDevices; CURRENT: 1.25A; DKPN: F10986CT-ND; MANUFACTURER: Littelfuse Inc.; MOPN: 576-08851.25DR; MPN: 08851.25DR; VOLTAGE: 500V
H1-H4 U$23-U$39 U$41 = HyTechDevices
J7 = HyTechDevices; DKPN: S7107-ND; MANUFACTURER: Sullins Connector Solutions; MPN: PPPC042LFBN-RC
J8 = HyTechDevices; MANUFACTURER: Molex; MPN: 2068320423
J9 = HyTechDevices; MANUFACTURER: Molex; MPN: 2165713006
J10 = HyTechDevices; MANUFACTURER: Molex; MPN: 2165713007
J11 J12 = HyTechDevices; DKPN: WM1832CT-ND; MANUFACTURER: Molex; MOPN: 538-0430450411; MPN: 0430450411
K4 = HyTechDevices; DKPN: 1835-1040-ND; MANUFACTURER: Comus International; MPN: 3350-4275-126
K5 = HyTechDevices; DKPN: 1835-1037-ND; MANUFACTURER: Comus International; MPN: 3350-1275-126
L4 = HyTechDevices; CURRENT_RATED: 1.6A; CURRENT_SATURATION: 1A; DCR: 0.13Ω; DKPN: 553-3508-2-ND; INDUCTANCE: 3.6uH; MANUFACTURER: Pulse Electronics Power; MOPN: 673-PA4334362NLT; MPN: PA4334.362NLT; TOLERANCE: 20%
L5 = HyTechDevices; CURRENT_RATED: 1.4A; CURRENT_SATURATION: 2A; DCR: 342mΩ; DKPN: 732-11454-2-ND; INDUCTANCE: 56µH; MANUFACTURER: Wurth Elektronik; MOPN: 710-74437349560; MPN: 74437349560; TOLERANCE: 20%
L6 = HyTechDevices; CURRENT_RATED: 0.65A; CURRENT_SATURATION: 0.52A; DCR: 0.640Ω; DKPN: SRU1048-331YTR-ND; INDUCTANCE: 330µH; MANUFACTURER: Bourns Inc.; MOPN: 652-SRU1048-331Y; MPN: SRU1048-331Y; TOLERANCE: 30%
Q5 = HyTechDevices; DKPN: 1727-8588-1-ND; MANUFACTURER: Nexperia USA Inc.; MOPN: 771-PMV15ENEAR; MPN: PMV15ENEAR
R83 = HyTechDevices; DKPN: 1712-CPF0603B1R62E1TR-ND; MANUFACTURER: TE Conductivity Passive Product; MOPN: 279-CPF0603B1R62E1; MPN: CPF0603B1R62E1; POWER: 0.1W; RESISTANCE: 1.62; TOLERANCE: 0.1%; VOLTAGE_CONTINUOUS: 0.51V; VOLTAGE_MAX: 50V
R93 R95 R96 R110-R112 R116-R121 = HyTechDevices; DKPN: 311-1.00KHRCT-ND; MANUFACTURER: Yageo; MOPN: 603-RC0603FR-071KL; MPN: RC0603FR-071KL; POWER: 0.1W; RESISTANCE: 1k; TOLERANCE: 1%; VOLTAGE_CONTINUOUS: 10.00V; VOLTAGE_MAX: 75V
R94 = HyTechDevices; RESISTANCE: DNP
R97 = HyTechDevices; DKPN: 311-10.0HRCT-ND; MANUFACTURER: Yageo; MOPN: 603-RC0603FR-0710RL; MPN: RC0603FR-0710RL; POWER: 0.1W; RESISTANCE: 10; TOLERANCE: 1%; VOLTAGE_CONTINUOUS: 1V; VOLTAGE_MAX: 75V
R98 R101 = HyTechDevices; DKPN: 311-10.0KHRCT-ND; MANUFACTURER: Yageo; MOPN: 603-RC0603FR-0710KL; MPN: RC0603FR-0710KL; POWER: 0.1W; RESISTANCE: 10k; TOLERANCE: 1%; VOLTAGE_CONTINUOUS: 31.62V; VOLTAGE_MAX: 75V
R99 = HyTechDevices; DKPN: RHM365KAHTR-ND; MANUFACTURER: Rohm; MOPN: 755-KTR10EZPF3653; MPN: KTR10EZPF3653; POWER: 0.125W; RESISTANCE: 365k; TOLERANCE: 1%; VOLTAGE_CONTINUOUS: 213V; VOLTAGE_MAX: 350V
R100 = HyTechDevices; DKPN: YAG1651TR-ND; MANUFACTURER: Yageo; MOPN: 603-RT0603BRD073K32L; MPN: RT0603BRD073K32L; POWER: 0.1W; RESISTANCE: 3.32k; TOLERANCE: 0.1%; VOLTAGE_CONTINUOUS: 18.22V; VOLTAGE_MAX: 75V
R102 = HyTechDevices; DKPN: RT0603BRE0775KL-ND; MANUFACTURER: Yageo; MOPN: 603-RT0603BRE0775KL; MPN: RT0603BRE0775KL; POWER: 0.1W; RESISTANCE: 75k; TOLERANCE: 0.1%; VOLTAGE_CONTINUOUS: 75V; VOLTAGE_MAX: 75V
R103 R104 = HyTechDevices; DKPN: P20144TR-ND; MANUFACTURER: Panasonic Electronic Components; MOPN: 667-ERJ-PB3B3322V; MPN: ERJ-PB3B3322V; POWER: 0.1W; RESISTANCE: 33.2k; TOLERANCE: 0.1%; VOLTAGE_CONTINUOUS: 57.6V; VOLTAGE_MAX: 75V
R105 = HyTechDevices; DKPN: YAG4603TR-ND; MANUFACTURER: Yageo; MOPN: 603-RT0603BRD078K66L; MPN: RT0603BRD078K66L; POWER: 0.1W; RESISTANCE: 8.66k; TOLERANCE: 0.1%; VOLTAGE_CONTINUOUS: 29.43V; VOLTAGE_MAX: 75V
R106 = HyTechDevices; DKPN: P20098TR-ND; MANUFACTURER: Panasonic Electronic Components; MOPN: 667-ERJ-PB3B1302V; MPN: ERJ-PB3B1302V; POWER: 0.1W; RESISTANCE: 13k; TOLERANCE: 0.1%; VOLTAGE_CONTINUOUS: 36V
R107 = HyTechDevices; DKPN: P20935TR-ND; MANUFACTURER: Panasonic Electronic Components; MOPN: 667-ERJ-PB6B9763V; MPN: ERJ-PB6B9763V; POWER: 0.25W; RESISTANCE: 976k; TOLERANCE: 0.1%; VOLTAGE_CONTINUOUS: 150V; VOLTAGE_MAX: 150V
R108 R109 = HyTechDevices; DKPN: P3.3AJTR-ND; MANUFACTURER: Panasonic Electronic Components; MOPN: 667-ERJ-3RQF3R3V; MPN: ERJ-3RQF3R3V; POWER: 0.1W; RESISTANCE: 3.3; TOLERANCE: 1%; VOLTAGE_CONTINUOUS: 0.57V; VOLTAGE_MAX: 75V
R113 = HyTechDevices; DKPN: P20936TR-ND; MANUFACTURER: Panasonic Electronic Components; MOPN: 667-ERJ-PB6B1004V; MPN: ERJ-PB6B1004V; POWER: 0.25W; RESISTANCE: 1M; TOLERANCE: 0.1%; VOLTAGE_CONTINUOUS: 150V; VOLTAGE_MAX: 150V
R114 = HyTechDevices; DKPN: P20904TR-ND; MANUFACTURER: Panasonic Electronic Components; MOPN: 667-ERJ-PB6B5233V; MPN: ERJ-PB6B5233V; POWER: 0.25W; RESISTANCE: 523k; TOLERANCE: 0.1%; VOLTAGE_CONTINUOUS: 150V; VOLTAGE_MAX: 150V
R115 = HyTechDevices; DKPN: P154KDBCT-ND; MANUFACTURER: Panasonic Electronic Components; MOPN: 667-ERA-3AEB1543V; MPN: ERA-3AEB1543V; POWER: 0.1W; RESISTANCE: 154k; TOLERANCE: 0.1%; VOLTAGE_CONTINUOUS: 75V; VOLTAGE_MAX: 75V
R122 R128 = HyTechDevices; DKPN: RHM360KAYTR-ND; MANUFACTURER: Rohm Semiconductor; MOPN: 755-KTR03EZPF3603; MPN: KTR03EZPF3603; POWER: 0.1W; RESISTANCE: 360k; TOLERANCE: 1%; VOLTAGE_CONTINUOUS: 190V; VOLTAGE_MAX: 350V
R123 R129 = HyTechDevices; DKPN: RHM510KAYTR-ND; MANUFACTURER: Rohm Semiconductor; MOPN: 755-KTR03EZPF5103; MPN: KTR03EZPF5103; POWER: 0.1W; RESISTANCE: 510k; TOLERANCE: 1%; VOLTAGE_CONTINUOUS: 226V; VOLTAGE_MAX: 350V
R124-R127 = HyTechDevices; DKPN: RHM33KAYTR-ND; MANUFACTURER: Rohm Semiconductor; MOPN: 755-KTR03EZPF3302; MPN: KTR03EZPF3302; POWER: 0.1W; RESISTANCE: 33k; TOLERANCE: 1%; VOLTAGE_CONTINUOUS: 57.4V; VOLTAGE_MAX: 350V
R130-R132 = HyTechDevices; DKPN: B20J10KE-ND; MANUFACTURER: Ohmite; MOPN: 588-B20J10KE; MPN: B20J10KE; POWER: 20W; RESISTANCE: 10k; TOLERANCE: 5%; VOLTAGE_CONTINUOUS: 447V; VOLTAGE_MAX: 750V
R133 = HyTechDevices; DKPN: B20J750E-ND; MANUFACTURER: Ohmite; MOPN: 588-B20J750E; MPN: B20J750E; POWER: 20W; RESISTANCE: 750; TOLERANCE: 5%; VOLTAGE_CONTINUOUS: 122V; VOLTAGE_MAX: 750V
R175 R176 R178 R179 = HyTechDevices; DKPN: P16053TR-ND; MANUFACTURER: Panasonic Electronic Components; MOPN: 667-ERJ-P06D56R0V; MPN: ERJ-P06D56R0V; POWER: 0.5W; RESISTANCE: 56; TOLERANCE: 5%; VOLTAGE_CONTINUOUS: 5.29V; VOLTAGE_MAX: 400V
R177 R180 = HyTechDevices; DKPN: P16039TR-ND; MANUFACTURER: Panasonic Electronic Components; MOPN: 667-ERJ-P03J5R1V; MPN: ERJ-P03J5R1V; POWER: 0.25W; RESISTANCE: 5.1; TOLERANCE: 1%; VOLTAGE_CONTINUOUS: 1.13V; VOLTAGE_MAX: 150V
TP1-TP5 TP8-TP21 = HyTechDevices; DKPN: 36-5015CT-ND; MANUFACTURER: Keystone Electronics; MOPN: 534-5015; MPN: 5015
U23 = HyTechDevicesTempTSB; DKPN: 1102-DCM4623TD2J13D0T70-ND; MANUFACTURER: Vicor; MOPN: 492-DCM4623D2J13D0T7; MPN: DCM4623TD2J13D0T70
U24 = HyTechDevicesTempTSB; DKPN: 255-2897-ND; MANUFACTURER: Panasonic Industrial Devices; MOPN: 769-AQY414EHA; MPN: AQY414EHA
U31 = HyTechDevices; DKPN: 2156-SN74LVC1G04DCKR-ND; MANUFACTURER: Texas Instruments; MOPN: 595-SN74LVC1G04DCKR; MPN: SN74LVC1G04DCKR
U32 = HyTechDevices; DKPN: LTC3639EMSE#TRPBFTR-ND; MANUFACTURER: Analog Devices Inc.; MOPN: 584-LTC3639EMSETRPBF; MPN: LTC3639EMSE#TRPBF
U33 = HyTechDevices; DKPN: LR8K4-GTR-ND; MANUFACTURER: Microchip Technology; MOPN: 689-LR8K4-G; MPN: LR8K4-G
U34 U35 = HyTechDevices; DKPN: 296-52316-1-ND; MANUFACTURER: Texas Instruments; MOPN: 595-ISO224BDWVR; MPN: ISO224BDWVR
U36 = HyTechDevices; DKPN: 497-17240-1-ND; MANUFACTURER: STMicroelectronics; MOPN: 511-LDL1117S50R; MPN: LDL1117S50R
U37 = HyTechDevices; DKPN: 505-LTC6994CS6-1#TRMPBFTR-ND; MANUFACTURER: Analog Electronics; MOPN: 584-C6994CS6-1TRMPBF; MPN: LTC6994CS6-1#TRMPBF
U$2 = HyTechDevices; DKPN: 255-1436-5-ND; MANUFACTURER: AQY214EHA; MOPN: 769-AQY214EHA; MPN: AQY214EHA
U$43 U$46 U$47 U$53 U$56-U$77 U$81 U$82 = HyTechManufacturing
U$44 U$45 U$48 U$52 U$54 U$55 = HyTechAesthetics
XF2 = HyTechDevices; DKPN: 36-3568-ND; MANUFACTURER: Keystone; MOPN: 534-3568; MPN: 3568

## Nets
+5V1: C66.1 C67.1 C68.1 C69.1 C75.1 C77.1 C79.1 C80.1 R113.2 R119.1 TP2.1 U31.5 U34.8 U35.8 U36.2 U36.4 U37.5
+12V1: C76.1 C78.1 J7.1 R111.2 TP1.1 U36.3
+12V3: J11.1 R175.1 R176.1 R177.1
+12V4: J12.1 R178.1 R179.1 R180.1
DCDC+: J8.1 J8.3 R110.2 TP11.1 XF2.3 XF2.4
DCDC-: C34.- C38.1 C41.1 C42.1 D22.1 J8.2 J8.4 TP12.1 U23.7 U23.9
ENABLE: U23.3 U24.4
GND1: C66.2 C67.2 C68.2 C69.2 C75.2 C76.2 C77.2 C78.2 C79.2 C80.2 C81.2 D19.A D21.1 D23.1 D24.1 D25.1 D26.1 D27.1 D28.1 J7.4 K4.3 Q5.2 R98.1 R114.1 R115.1 TP3.1 U24.2 U31.3 U34.5 U35.5 U36.1 U37.2 U$2.2
GND_GREEN: D39.B- J11.4
GND_GREEN1: D43.B- J12.4
GND_RED: D39.A- J11.3
GND_RED1: D43.A- J12.3
IP+: J7.5 TP5.1 U35.7
IP-: J7.6 TP8.1 U35.6
IT+: J7.7 TP9.1 U34.7
IT-: J7.8 TP10.1 U34.6
LED+: J9.3 R112.2
N$21: C44.1 C55.1 D17.A D30.A R100.2 R101.1 U33.2
N$28: C59.2 R101.2
N$31: C56.1 C57.1 C59.1 C64.1 D17.C R107.2 U32.3
N$32: L4.2 R83.1
N$33: C17.1 C19.1 C21.1 L4.1 L5.1 U23.1
N$34: D18.2 R93.2
N$35: R93.1 U23.4
N$38: R94.1 U23.2
N$40: C34.+ C38.2 C41.2 C42.2 U23.6 U23.8 XF2.1 XF2.2
N$42: D20.A K5.3 Q5.3
N$62: C73.1 R103.2 U35.2
N$63: C74.1 R104.2 U34.2
N$64: R102.2 U32.11
N$65: L6.1 U32.1
N$66: D21.3 R97.1 R98.2 R118.2 U31.4
N$67: K5.4 R133.1
N$68: K4.4 R132.2
N$69: C70.1 U35.1
N$70: R96.1 U$2.1
N$71: R109.2 U$2.3
N$72: Q5.1 R97.2
N$73: C62.1 U34.1
N$74: R95.2 U24.1
N$75: R103.1 R126.2 R127.2 R129.1
N$76: U32.7 U32.10
N$77: R104.1 R123.1 R124.2 R125.2
N$78: C18.1 C54.1 D30.C R108.2 U33.1
N$79: D22.2 R110.1
N$80: D23.2 R111.1
N$81: R105.2 R106.1 U32.12
N$82: R106.2 R107.1 U32.14
N$83: R113.1 R114.2 U37.6
N$84: C81.1 R115.2 U37.3
N$85: R95.1 R116.2 U37.4
N$86: D24.2 R116.1
N$87: D25.2 R117.1
N$88: D26.2 R118.1
N$89: D27.2 R119.2
N$90: D28.2 R120.1
N$91: D29.2 R121.1
N$92: R128.1 R129.2
N$93: R122.1 R123.2
N$94: R99.2 R100.1 U33.3
N$124: D37.A- D38.A+
N$125: D37.B- D38.B+
N$126: D36.A- D37.A+
N$127: D36.B- D37.B+
N$128: D36.A+ R175.2 R176.2
N$129: D36.B+ R177.2
N$130: D36.THERMAL D37.THERMAL H1.P$1
N$131: D38.THERMAL D39.THERMAL H2.P$1
N$132: D38.A- D39.A+
N$133: D38.B- D39.B+
N$134: D41.A- D42.A+
N$135: D41.B- D42.B+
N$136: D40.A- D41.A+
N$137: D40.B- D41.B+
N$138: D40.A+ R178.2 R179.2
N$139: D40.B+ R180.2
N$140: D40.THERMAL D41.THERMAL H3.P$1
N$141: D42.THERMAL D43.THERMAL H4.P$1
N$142: D42.A- D43.A+
N$143: D42.B- D43.B+
PACK+: J10.5 K5.1 TP14.1 U$2.4
PACK+FUSED: R109.1 R128.2 TP15.1
PRECHARGE_OK1: J7.3 R117.2 TP4.1 U31.2 U37.1
SHDN1: D19.C D20.C J7.2 K4.2 K5.2 R96.2 R120.2 TP13.1
TS+5V: C58.1 C60.1 C61.1 C63.1 C65.1 C71.1 C72.1 L6.2 R112.1 R121.2 TP20.1 U32.9 U34.3 U35.3
TS+FUSED: F6.2 J10.4 L5.2 R83.2 R108.1 R122.2
TS+UNFUSED: F6.1 J10.1 J10.2 K4.1 R130.1 R133.2 TP17.1
TS-FUSED: C17.2 C18.2 C19.2 C21.2 C44.2 C54.2 C55.2 C56.2 C57.2 C58.2 C60.2 C61.2 C62.2 C63.2 C64.2 C65.2 C70.2 C71.2 C72.2 C73.2 C74.2 D18.1 D29.1 F2.2 J9.1 J9.2 R94.2 R99.1 R102.1 R105.1 R124.1 R125.1 R126.1 R127.1 TP21.1 U23.5 U24.3 U32.6 U32.8 U32.16 U34.4 U35.4
TS-UNFUSED: F2.1 J9.5 R131.1 R132.1 TP16.1
TSMP+: J10.3 R130.2 TP18.1
TSMP-: J9.4 R131.2 TP19.1